# EAGLE board Light-Proximity-Switch-vB2.1 (EAGLE 9.5.2)
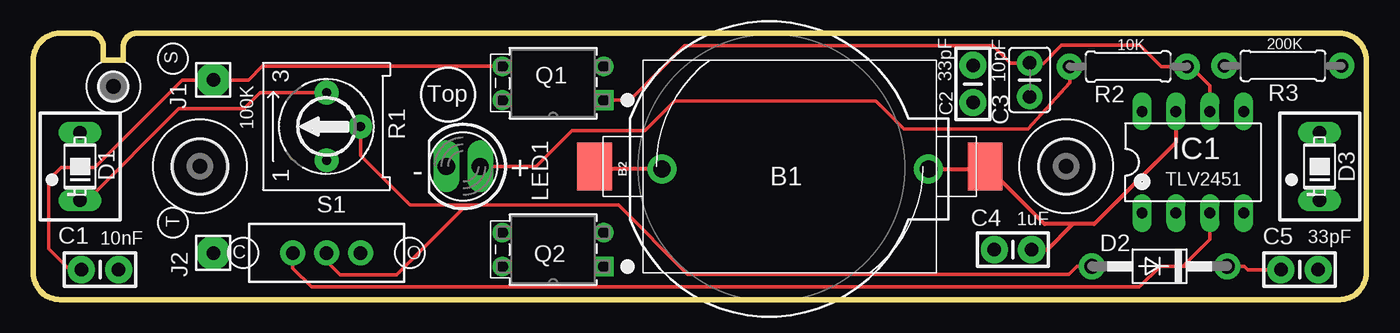
[diagram p0: board, top side]
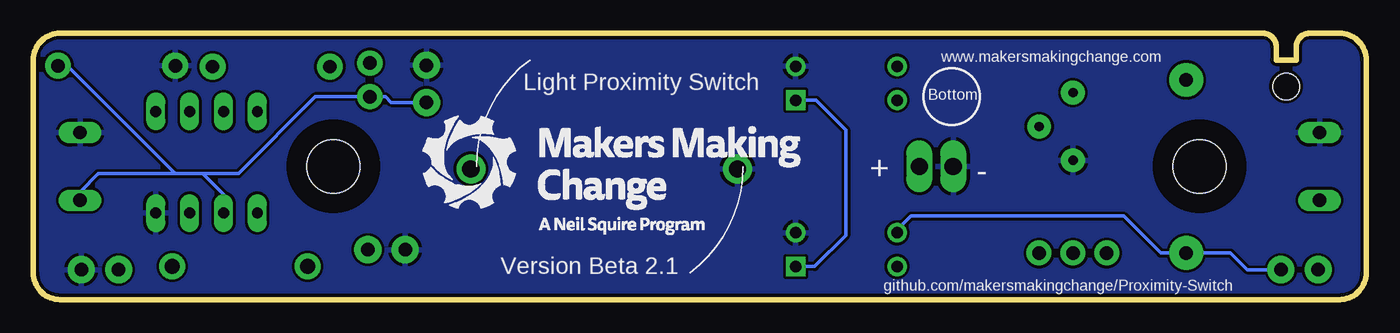
[diagram p1: board, bottom side, seen from below]

Size 100 x 20 mm. Coordinates in mm from the lower left corner, seen from the top.
Outline: 2,0 98,0 arc90 100,2 100,18 arc90 98,20 7.75,20 arc90 6.75,19 6.75,18 5.25,18 5.25,19 arc90 4.25,20 2,20 arc90 0,18 0,2 arc90 2,0
Copper layers (1*16): Top 0.035mm / dielectric 1.5mm / Bottom 0.035mm
Design rules "SparkFun": minimum track width 8mil, minimum drill 20mil, track to track 8mil, track to pad 8mil, pad to pad 8mil, via to via 8mil, smd to smd 8mil, copper to edge 10mil, drill to drill 8mil, minimum pad ring 12mil, minimum via ring 10mil, stop-mask expansion 4mil, vias tented up to drill 25mil, thermal gap 10mil
Net classes: 2 GND2: clearance 0.205 mm to class 0, clearance 0.205 mm to class 1, clearance 0.205 mm; 3 GND3: clearance 0.205 mm to class 0, clearance 0.205 mm to class 1, clearance 0.205 mm to class 2, clearance 0.205 mm

## Footprints (pad centres in the part's own frame; a part is rotated, then mirrored left to right if it is on the bottom)
CR2032_SMT_HOLDER = smd 2.6 x 3.6: + 14.65,0; - -14.65,0
BATTCOM_20MM_PTH = drill 1.3 pad 2.184: + 11.85,0; - -8.15,0
CAP-PTH-SMALL-KIT = drill 1.016 pad 2.032: 1 -1.397,0; 2 1.397,0
C025-030X050 = drill 1.016 pad 1.88: 1 -1.27,0; 2 1.27,0
BPW32 = drill 1 long: A 0,2.54; K 0,-2.54
DO41-10 = drill 1.118 pad 1.93: A 5.08,0; C -5.08,0
HOLE-4MM = hole 4: 0,0
HOLE-2MM-CLEAR = hole 2: 0,0
DIL08 = drill 0.813 long: 1 -3.81,-3.81; 2 -1.27,-3.81; 3 1.27,-3.81; 4 3.81,-3.81; 5 3.81,3.81; 6 1.27,3.81; 7 -1.27,3.81; 8 -3.81,3.81
PAD-1X01 = drill 1.016 pad 2.54: 1 0,0
LED_5MM_GREEN = drill 1.3 pad 1.676 long: A -1.27,0; K 1.27,0
HVM-DIP = drill 0.864 pad 1.372 square: 1 -3.81,1.27 | drill 0.864 pad 1.372: 2 -3.81,-1.27; 3 3.81,-1.27; 4 3.81,1.27
3386P-T = drill 0.7 pad 1.778: A -2.54,0; E 2.54,0; S 0,-2.54
RESISTOR_0206/8 = drill 1 pad 1.93: 1 -4.4,0; 2 4.4,0
SWITCH_SPDT_PTH_11.6X4.0MM = drill 1.016 pad 1.88: 1 0,2.54; 2 0,0; 3 0,-2.54

## Placement (x,y rotation side)
B1  BATTERY-CR2032_SMT  [CR2032_SMT_HOLDER]  56.75,10 0 top
B2  BATTERY-20MM_PTH  [BATTCOM_20MM_PTH]  55.32,9.81 0 top
C1  10nF  [CAP-PTH-SMALL-KIT]  5,2.25 180 top
C2  33pF  [CAP-PTH-SMALL-KIT]  70.5,16.2 90 top
C3  10pF  [C025-030X050]  74.75,16.5 90 top
C4  1uF  [CAP-PTH-SMALL-KIT]  73.5,3.75 180 top
C5  33pF  [CAP-PTH-SMALL-KIT]  95,2.25 0 top
D1  BPW32  [BPW32]  3.5,10 0 top
D2  DIODE-DO41  [DO41-10]  84.5,2.5 180 top
D3  BPW32  [BPW32]  96.5,10 0 top
H1  MOUNT-HOLE-4MM  [HOLE-4MM]  12.5,10 0 top
H2  MOUNT-HOLE-4MM  [HOLE-4MM]  77.5,10 0 top
H3  MOUNT-HOLE-2MM-CLEAR  [HOLE-2MM-CLEAR]  6,16 0 top
IC1  TLV2451  [DIL08]  87,10.31 0 top
J1  PAD_1X01-  [PAD-1X01]  13.5,16.5 0 top
J2  PAD_1X01-  [PAD-1X01]  13.5,3.5 0 top
LED1  [LED_5MM_GREEN]  32.25,10 180 top
Q1  IRLD110-HVM-DIP  [HVM-DIP]  39,16.25 180 top
Q2  IRLD110-HVM-DIP  [HVM-DIP]  39,3.75 180 top
R1  100K  [3386P-T]  22,13 90 top
R2  10K  [RESISTOR_0206/8]  82.15,17.5 0 top
R3  200K  [RESISTOR_0206/8]  93.75,17.56 0 top
S1  [SWITCH_SPDT_PTH_11.6X4.0MM]  22,3.5 270 top

## Library data of the parts
B1 B2 C5 D1-D3 H1-H3 IC1 J1 J2 LED1 Q1 Q2 R1-R3 S1 = MMC Eagle
C1 = MMC Eagle; C1: 1UF
C2 = MMC Eagle; C2: 33pF
C3 = MMC Eagle; C3: 10pF
C4 = MMC Eagle; C4: 1uF

## Nets
+3V3: B1.+ B2.+ C4.1 IC1.7
GND: B1.- B2.- C2.2 C4.2 C5.2 D1.A D3.A IC1.4 LED1.K Q1.2 Q2.2 R1.A R3.1
N$1: D2.A R1.S S1.2
N$2: C5.1 D2.C IC1.3 S1.3
N$3: D1.K R1.E
N$4: C3.2 IC1.6 Q1.1 Q2.1 R2.2
N$6: C1.2 J1.1 Q1.3
N$7: C1.1 J2.1 Q2.3
N$9: C2.1 C3.1 D3.K IC1.2 R3.2
N$15: LED1.A R2.1

## Tracks (layer width: path | path; a pad name or v marks a point on that pad's centre or on a via)
+3V3
  Top 0.305: B1.+ 71.53,10 | IC1.7 85.73,11.81 79.59,5.67 77.99,5.67 | 77.99,5.67 75.86,5.67 71.53,10 | C4.1 76.07,3.75 77.99,5.67 | B2.+ 71.34,9.81 71.53,10
GND
  Top 0.305: B2.- 42.29,9.81 B1.-
  pour Bottom: 2,0 98,0 arc90 100,2 100,18 arc90 98,20 2,20 arc90 0,18 0,2 arc90
N$1
  Top 0.254: D2.A 78.29,2.5 77.69,1.9 49.09,1.9 43.89,7.1 32.51,7.1 | 32.51,7.1 28.26,7.1 24.54,10.82 R1.S | 32.51,7.1 27.26,1.85 23.02,1.85 22,2.87 S1.2
N$2
  Top 0.254: 86.25,2.5 D2.C 90.87,2.5 91.12,2.25 C5.1 | 86.25,2.5 84.54,2.5 82.98,0.94 20.88,0.94 19.46,2.36 S1.3 | IC1.3 88.27,4.52 86.25,2.5
N$3
  Top 0.254: R1.E 17.03,15.54 15.83,14.34 10.91,14.34 4.03,7.46 D1.K
N$4
  Top 0.254: IC1.6 88.27,16.07 86.84,17.5 R2.2 84.62,17.5 83.03,19.09 77.13,19.09 75.76,17.72 C3.2 73.31,17.75 71.99,19.07 48.87,19.07 44.78,14.98 Q1.1
  Bottom 0.254: Q1.1 41.28,14.98 39.04,12.74 39.04,4.82 41.38,2.48 Q2.1
N$6
  Top 0.254: Q1.3 17.17,17.52 16.15,16.5 J1.1 11.17,16.5 4.6,9.93 2.08,9.93 1.17,9.02 1.17,3.81 2.73,2.25 C1.2
N$7
  Bottom 0.254: Q2.3 35.19,5.23 34.14,6.28 18.19,6.28 15.41,3.5 J2.1 10.18,3.5 8.93,2.25 C1.1
N$9
  Bottom 0.254: C2.1 73.14,14.8 73.57,15.23 C3.1 78.84,15.23 84.61,9.46 87.28,9.46 | D3.K 96.5,8.1 95.14,9.46 89.35,9.46 | 89.35,9.46 87.28,9.46 | IC1.2 85.73,7.91 87.28,9.46 | R3.2 97.45,17.56 89.35,9.46
N$15
  Top 0.254: LED1.A 37.72,10 40.4,12.68 45.88,12.68 48.11,14.91 63.23,14.91 65.32,12.82 74.62,12.82 77.75,16.28 R2.1

## Text on the board
bPlace: www.makersmakingchange.com | Light Proximity Switch | Bottom | Version Beta 2.1 | github.com/makersmakingchange/Proximity-Switch
tNames: S | Top | T | C | O